# Altium PCB Shoot&spin [v01].PcbDoc
Units mm, origin at the board's own origin, x right, y up, seen from the top; angles counter-clockwise.
Board outline 72.13 x 48.89 mm, 2 copper layers (Top Layer, Bottom Layer); 15 components, 15 nets, 47 pads, 0 vias.
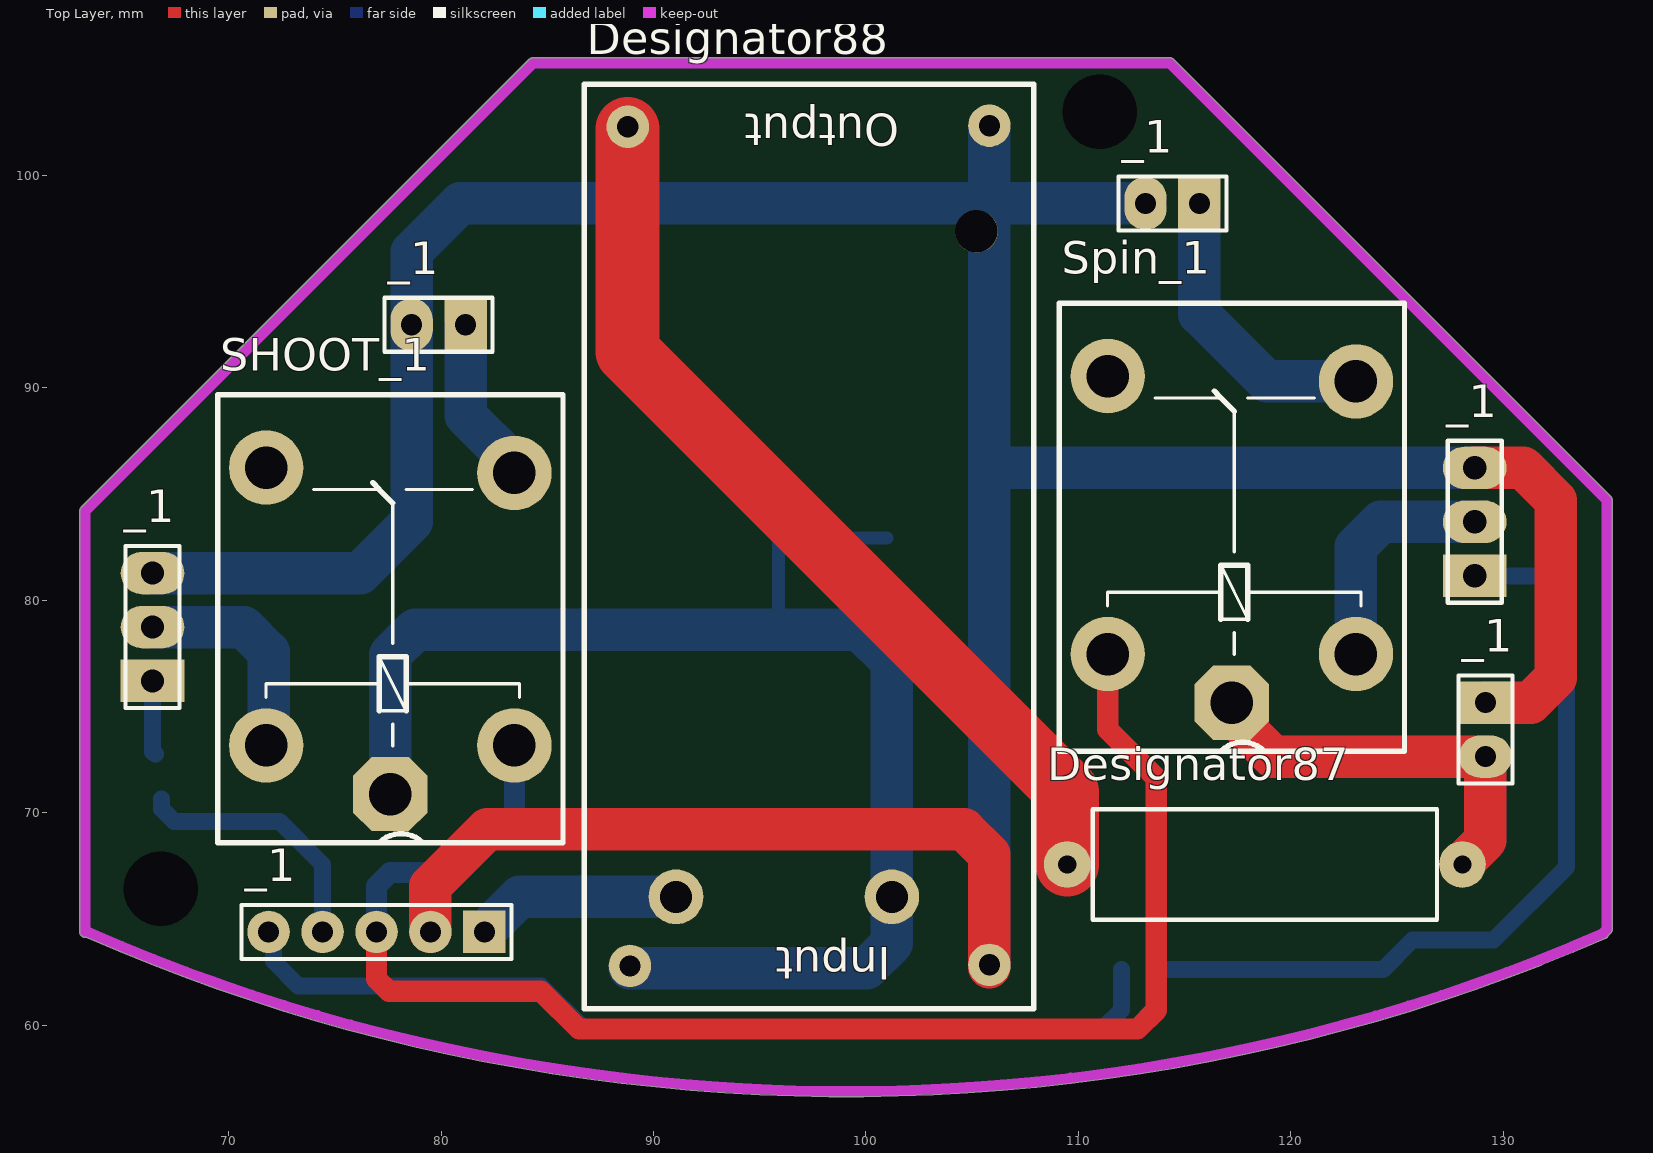
[diagram p0: Top Layer view]
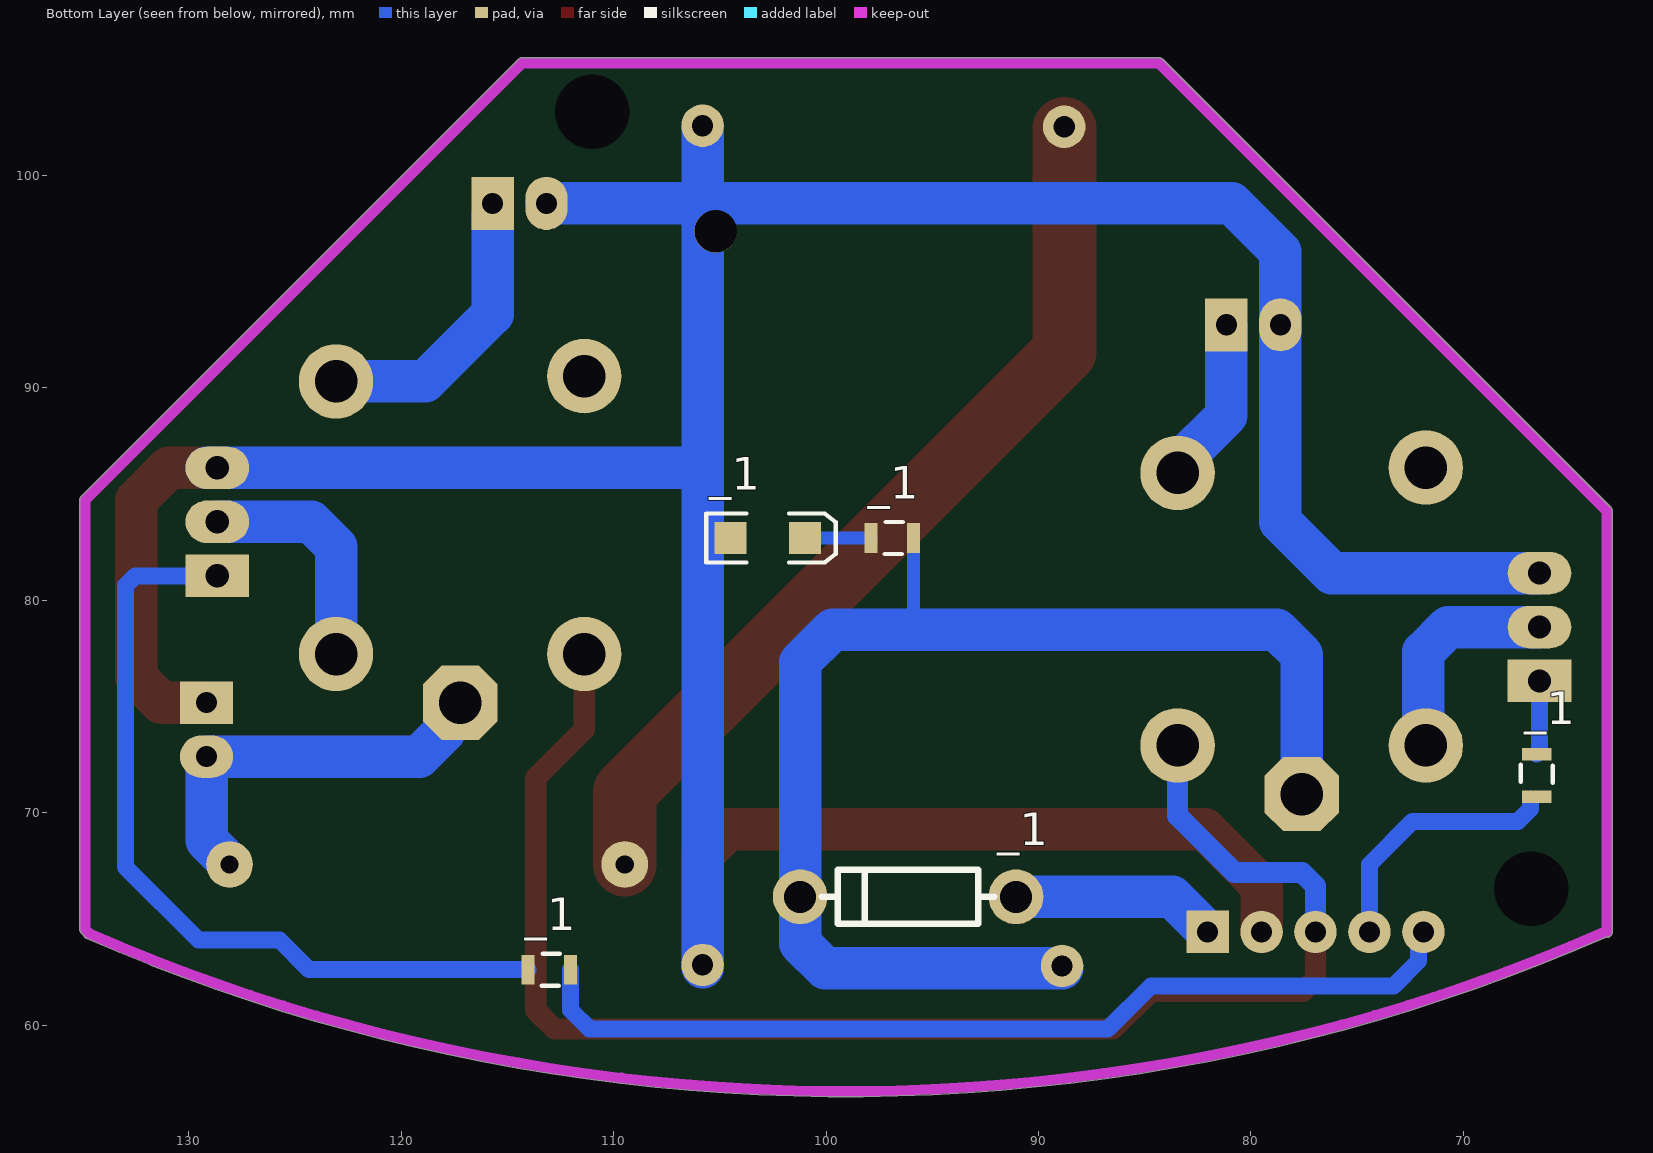
[diagram p1: Bottom Layer view, seen from below]

## Layer stack, top to bottom
Top Solder: solder mask 0.0102, Solder Resist, Dk 3.5
Top Layer: signal copper 0.0356
Dielectric 1: dielectric 0.32, FR-4, Dk 4.8
Bottom Layer: signal copper 0.0356
Bottom Solder: solder mask 0.0102, Solder Resist, Dk 3.5

## Board outline
62.996,64.389 62.996,84.201 cw(c63.246,84.201) 63.069,84.378 84.151,105.46 cw(c84.328,105.283) 84.328,105.533 114.3,105.533 cw(c114.3,105.283) 114.477,105.46 135.051,84.886 cw(c134.874,84.709) 135.124,84.709 135.124,64.516 cw(c134.874,64.516) 135.051,64.339 134.939,64.227 cw(c134.704,64.312) 134.804,64.082 cw(c99.115,145.887) 63.354,64.114 63.302,64.145 cw(c63.246,64.389)

## Design rules (kind name [scope] priority, off if disabled: settings)
Clearance [All] p1: gap=0.254 ignorepadtopadclearanceinfootprint=FALSE except(0: Arc-Hole Track-Hole SMDPad-Hole THPad-Hole Via-Hole Fill-Hole Poly-Hole Region-Hole Text-Hole)
PolygonConnect [All] p1: connectstyle=Relief reliefconductorwidth=0.254 reliefentries=4 polygonreliefangle="90 Angle" airgapwidth=0.254
RoutingVias [All] p1: holewidth=0.711 width=1.27 viastyle="Through Hole" minholewidth=0.711 minwidth=1.27 maxholewidth=0.711 maxwidth=1.27
SolderMaskExpansion [All] p1: expansion=0.102 istentingtop=FALSE
Width [All] p1: maxlimit=3 minlimit=0.254 preferedwidth=1
30 further rules are at their usual default settings.

## Components (designator, comment, footprint, x,y, rotation, side; value= is the part's Value field where it differs from the comment)
_1 "" DIODE0.4 91.059,66.04 r0 bottom
_1 "Comment" 3.2X1.6X1.1 102.743,82.931 r180 bottom
_1 "Comment" MY_RES_SMD_0805#1 96.885,82.931 r0 bottom
_1 "Comment" MY_RES_SMD_0805#2 66.548,71.755 r270 bottom
_1 "Comment" MY_RES_SMD_0805#3 113.03,62.611 r0 bottom
_1 "Comment" HDR1X5 82.042,64.389 r180 top
_1 "Comment" HDR1X2#1 81.153,92.964 r180 top
_1 "Comment" HDR1X2#2 129.159,75.184 r270 top
_1 "Comment" HDR1X2#3 115.697,98.679 r180 top
_1 "Comment" HDR1X3#1 128.651,81.153 r90 top
_1 "Comment" HDR1X3#2 66.421,76.2 r90 top
Designator87 "Comment" RES-(2/1) 109.474,67.564 r0 top
Designator88 "Comment" LM2576 107.84,60.757 r90 top
SHOOT_1 "Comment" My_rel 77.597,77.851 r180 top
Spin_1 "Comment" My_rel 117.208,82.156 r180 top

## Footprints (in the part's own frame and the unit in brackets; to place one, negate y for a bottom-side part, rotate by r counter-clockwise, add the part's x,y. Pads: shape width x height; smd on the part's side, far side on the other; paste and mask are expansions set on the pad)
3.2X1.6X1.1 [mm]
  rect 1.5x1.5 smd: 3(-1.75,0) 4(1.75,0)
  silkscreen extent -2.9,-1.15 3.2,1.15
DIODE0.4 [mm]
  round 2.575 hole 1.5: 1(0,0) 2(10.16,0)
  silkscreen extent 1.02,-1.27 9.14,1.27
HDR1X2#1 [mm]
  rect 2x2.5 hole 1: 16(0,0)
  oval 2x2.5 hole 1: 17(2.54,0)
  silkscreen extent -1.27,-1.27 3.81,1.27
HDR1X2#2 [mm]
  oval 2x2.5 hole 1: 18(2.54,0)
  rect 2x2.5 hole 1: 19(0,0)
  silkscreen extent -1.27,-1.27 3.81,1.27
HDR1X2#3 [mm]
  rect 2x2.5 hole 1: 20(0,0)
  oval 2x2.5 hole 1: 21(2.54,0)
  silkscreen extent -1.27,-1.27 3.81,1.27
HDR1X3#1 [mm]
  rect 2x3 hole 1.1: 22(0,0)
  oval 2x3 hole 1.1: 23(2.54,0) 24(5.08,0)
  silkscreen extent -1.27,-1.27 6.35,1.27
HDR1X3#2 [mm]
  rect 2x3 hole 1.1: 25(0,0)
  oval 2x3 hole 1.1: 26(2.54,0) 27(5.08,0)
  silkscreen extent -1.27,-1.27 6.35,1.27
HDR1X5 [mm]
  round 2 hole 1: 11(10.16,0) 12(7.62,0) 13(5.08,0) 14(2.54,0)
  rect 2x2 hole 1: 15(0,0)
  silkscreen extent -1.27,-1.27 11.43,1.27
LM2576 [mm]
  round 0 all layers, no hole: 0(6.807,18.491)
  round 2 hole 2: 0(36.601,2.642)
  round 2 hole 1: 1(2.032,18.948) 2(2.083,2.032) 3(41.58,2.032) 4(41.529,19.05)
  silkscreen extent 0.03,-0.05 43.54,21.11, body extent 0.04,0.04 43.54,21.04, height 13.91
My_rel [mm]
  oct 3.5x3.5 hole 2: 1(-0.013,6.972)
  round 3.5 hole 2: 2(-5.855,-8.141) 3(5.829,-8.395) 4(-5.855,4.686) 5(5.829,4.686)
  silkscreen extent -8.14,-11.82 8.12,9.26
MY_RES_SMD_0805#1 [mm]
  rect 0.6x1.4 smd: 5(-1,0) 6(1,0)
  silkscreen extent -0.5,-0.75 0.35,0.75
MY_RES_SMD_0805#2 [mm]
  rect 0.6x1.4 smd: 7(-1,0) 8(1,0)
  silkscreen extent -0.5,-0.75 0.35,0.75
MY_RES_SMD_0805#3 [mm]
  rect 0.6x1.4 smd: 9(-1,0) 10(1,0)
  silkscreen extent -0.5,-0.75 0.35,0.75
RES-(2/1) [mm]
  round 2.2 hole 0.85: 1(0,0) 2(18.6,0)
  silkscreen extent 1.2,-2.6 17.4,2.6

## Free pads (board coordinates)
  round 1.524 hole 3.5: 32(110.998,102.997) 33(66.802,66.421)

## Nets (pads, with @x,y where several pads share a name; then routed paths per layer and width w, separated by ;. In a path a pad name is that pad's centre, name@x,y a point inside that pad or via, vN(x,y) a via of type N, cw(c..) or ccw(c..) an arc to the next point about the centre after c; other vN are vias at no path point)
12V: _1.2 _1.5 Designator88.1 SHOOT_1.1 | length 62.3
  Bottom Layer w0.6: 95.758,78.613 95.885,78.74 _1.5
  Bottom Layer w2: SHOOT_1.1@77.216,71.272 SHOOT_1.1 77.61,77.441 78.781,78.613 95.758,78.613 99.695,78.613 101.219,77.089 101.219,63.859 100.047,62.687 Designator88.1@88.875,62.687
BASE1: _1.7 _1.25 | length 3.5
  Bottom Layer w0.8: _1.25 66.421,72.855 66.448,72.855 _1.7
BASE2: _1.10 _1.22 | length 38.7
  Bottom Layer w0.8: _1.10 124.333,62.611 125.73,64.008 129.54,64.008 132.969,67.437 132.969,80.684 132.5,81.153 _1.22
GND: _1.3 _1.14 _1.17 _1.19 _1.21 _1.24 _1.27 Designator88.0@105.199,97.358 Designator88.2 Designator88.3 | length 177.4
  Top Layer w2: _1.14 79.502,66.548 82.169,69.215 104.619,69.215 105.791,68.043 Designator88.2@105.791,62.738 ; _1.24 130.937,86.233 132.461,84.709 132.461,76.356 131.289,75.184 _1.19
  Bottom Layer w2: _1.27 76.2,81.28 78.613,83.693 _1.17 78.613,96.393 80.899,98.679 105.537,98.679 ; Designator88.2@105.791,62.738 105.791,62.84 105.791,97.358 105.791,98.679 ; 105.791,86.233 _1.24 _1.24@129.159,86.233 ; 105.791,99.822 105.791,98.933 ; Designator88.3@105.791,102.235 105.791,98.933 ; _1.21 105.791,98.679 ; 105.537,98.679 105.791,98.933 ; 105.537,98.679 105.791,98.679 ; 105.791,98.679 105.791,98.933
LED: _1.4 _1.6 | length 3.1
  Bottom Layer w0.6: _1.6 _1.4
SHOOT: _1.9 _1.11 | length 45
  Bottom Layer w0.8: _1.11 72.112,64.159 72.112,63.016 73.279,61.849 84.709,61.849 86.741,59.817 111.125,59.817 112.03,60.722 _1.9
SPIN: _1.8 _1.12 | length 12.3
  Bottom Layer w0.8: _1.8@66.848,70.655 66.848,70.185 67.437,69.596 72.39,69.596 74.422,67.564 _1.12
TIP1: _1.26 SHOOT_1.5 | length 10.4
  Bottom Layer w2: _1.26 70.71,78.74 71.882,77.568 71.882,73.279 SHOOT_1.5
TIP2: _1.23 Spin_1.4 | length 11.1
  Bottom Layer w2: Spin_1.4 123.063,82.521 124.235,83.693 _1.23
VCC: _1.13 SHOOT_1.4 Spin_1.5 | length 71.3
  Top Layer w1: _1.13 76.962,62.181 77.548,61.595 84.709,61.595 86.487,59.817 112.776,59.817 113.665,60.706 113.665,71.628 111.379,73.914 Spin_1.5
  Bottom Layer w1: _1.13 76.962,66.548 77.597,67.183 80.772,67.183 83.452,69.863 SHOOT_1.4
VIN: _1.1 _1.15 | length 9.7
  Bottom Layer w2: _1.15 83.693,66.04 _1.1
VOUT: Designator87.1 Designator88.4 | length 43.2
  Top Layer w3: Designator88.4@88.773,102.184 88.773,91.694 109.474,70.993 Designator87.1
"VS SHOOT": _1.18 Designator87.2 Spin_1.1 | length 37.8
  Top Layer w2: Spin_1.1 117.221,74.895 117.971,74.145 117.971,73.816 119.143,72.644 _1.18 129.159,68.703 128.074,67.618 Designator87.2
  Bottom Layer w2: Spin_1.1 117.221,74.895 117.971,74.145 117.971,73.816 119.143,72.644 _1.18 129.159,68.703 128.074,67.618 Designator87.2
VSHOOT: _1.20 Spin_1.2 | length 13.4
  Bottom Layer w2: _1.20@115.697,98.171 115.697,93.472 118.872,90.297 Spin_1.2
VSPIN: _1.16 SHOOT_1.2 | length 7.9
  Bottom Layer w2: _1.16 81.153,88.696 83.452,86.398 SHOOT_1.2
pads on no net: Designator88.0@89.349,67.564 SHOOT_1.3 Spin_1.3

## Keep-outs
Keep-Out Layer:
  lines w0.5: 63.246,64.389 63.246,84.201 84.328,105.283 114.3,105.283 134.874,84.709 134.874,64.516 134.747,64.389 ; 63.454,64.343 ccw(c99.115,145.887) 134.704,64.312

## Text inside footprints (layer, text, board x,y; h text height)
Designator88: Top Overlay "Output" at 101.567,102.895 h1.52 r180; Top Overlay "Input" at 101.16,63.678 h1.52 r180